# EAGLE board untitled (EAGLE 6.2)
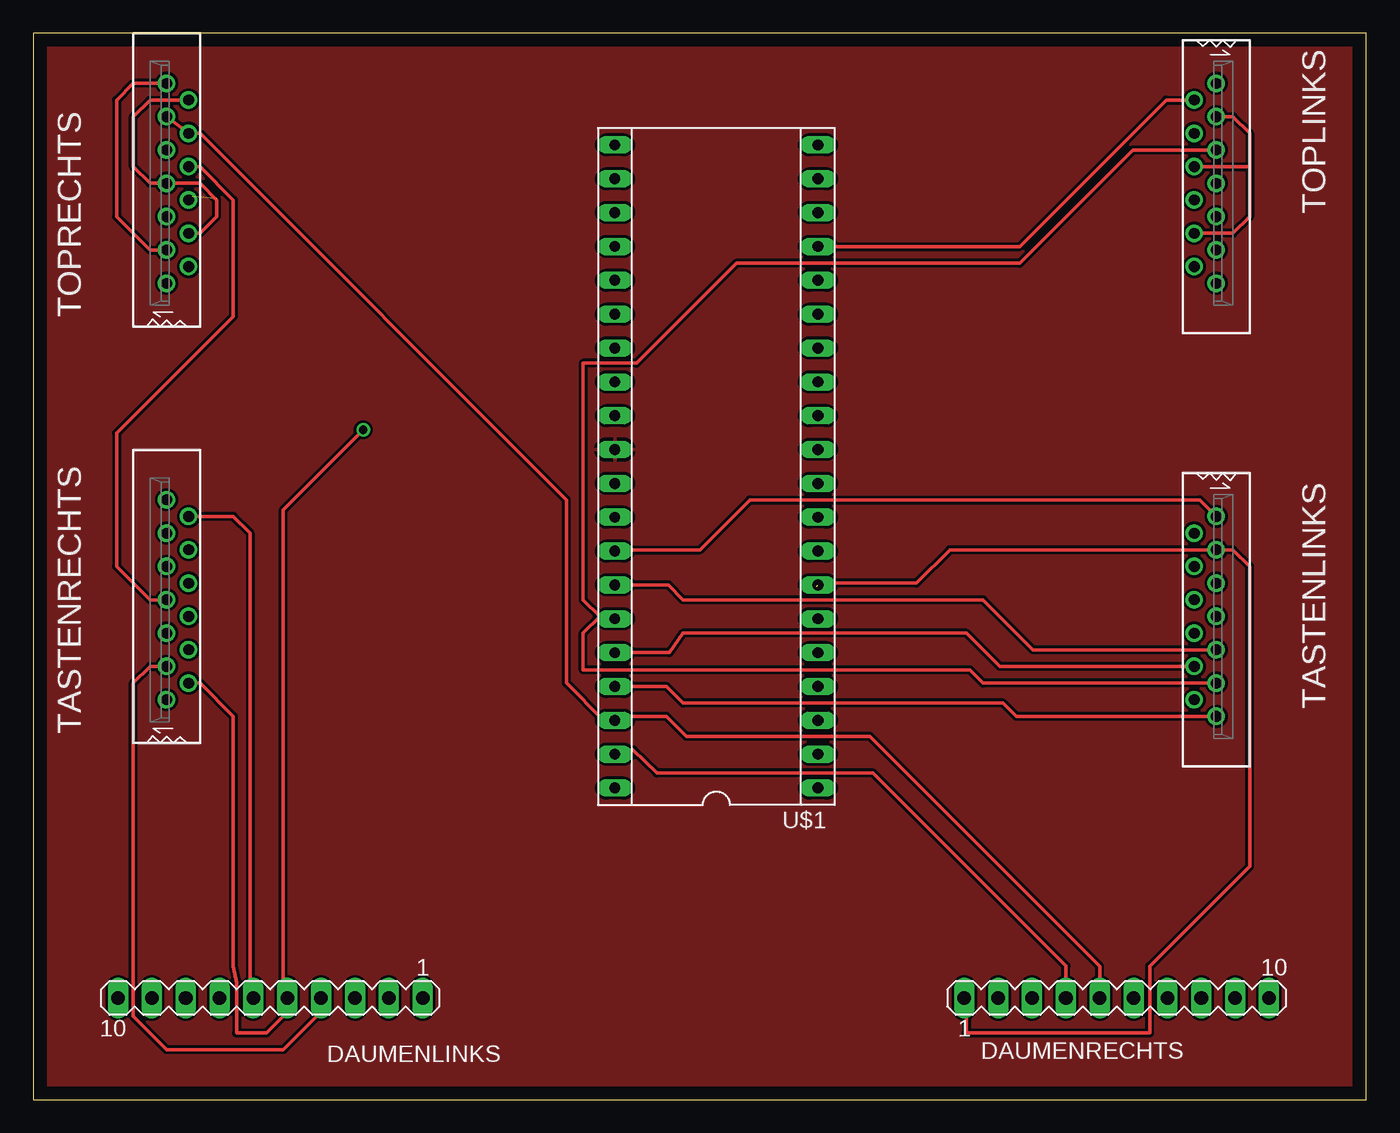
[diagram p0: board, top side]
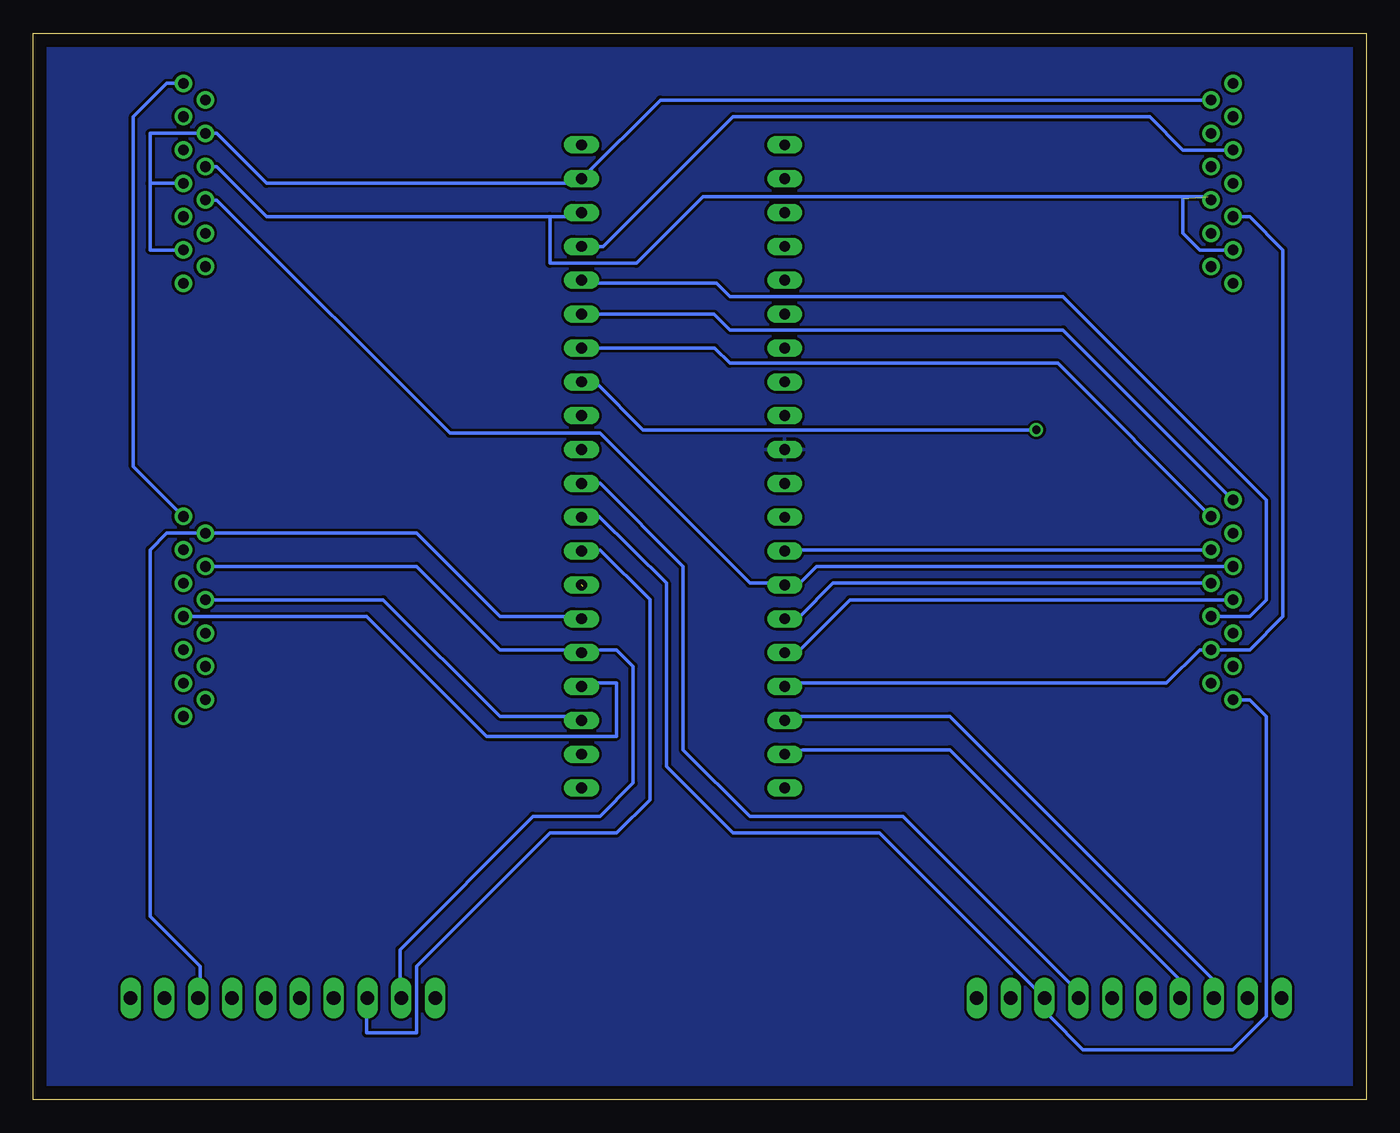
[diagram p1: board, bottom side, seen from below]

Size 100 x 80 mm. Coordinates in mm from the lower left corner, seen from the top.
Outline: 0,0 100,0 100,80 0,80 0,0
Copper layers (1*16): Top 0.035mm / dielectric 1.5mm / Bottom 0.035mm
Design rules: minimum track width 10mil, minimum drill 24mil, track to track 8mil, track to pad 8mil, pad to pad 8mil, via to via 8mil, smd to smd 8mil, copper to edge 40mil, drill to drill 8mil, minimum pad ring 10mil, minimum via ring 8mil, stop-mask expansion 4mil, vias tented up to drill 0mil, thermal gap 10mil

## Footprints (pad centres in the part's own frame; a part is rotated, then mirrored left to right if it is on the bottom)
MA10-1 = drill 1.016 long: 1 -11.43,0; 2 -8.89,0; 3 -6.35,0; 4 -3.81,0; 5 -1.27,0; 6 1.27,0; 7 3.81,0; 8 6.35,0; 9 8.89,0; 10 11.43,0
39-53-2135 = drill 0.8: P$1 -7.5,0; P$2 -6.25,-1.65; P$3 -5,0; P$4 -3.75,-1.65; P$5 -2.5,0; P$6 -1.25,-1.65; P$7 0,0; P$8 1.25,-1.65; P$9 2.5,0; P$10 3.75,-1.65; P$11 5,0; P$12 6.25,-1.65; P$13 7.5,0
TEENSY++ = drill 0.813 long: +5V -24.13,7.62; B0 -6.35,7.62; B1 -8.89,7.62; B2 -11.43,7.62; B3 -13.97,7.62; B4 -16.51,7.62; B5 -19.05,7.62; B6 -21.59,7.62; B7 -21.59,-7.62; C0 6.35,-7.62; C1 8.89,-7.62; C2 11.43,-7.62; C3 13.97,-7.62; C4 16.51,-7.62; C5 19.05,-7.62; C6 21.59,-7.62; C7 24.13,-7.62; D0 -19.05,-7.62; D1 -16.51,-7.62; D2 -13.97,-7.62; D3 -11.43,-7.62; D4 -8.89,-7.62; D5 -6.35,-7.62; D6 -3.81,-7.62; D7 -1.27,-7.62; E0 1.27,-7.62; E1 3.81,-7.62; E6 -1.27,7.62; E7 -3.81,7.62; F0 6.35,7.62; F1 8.89,7.62; F2 11.43,7.62; F3 13.97,7.62; F4 16.51,7.62; F5 19.05,7.62; F6 21.59,7.62; F7 24.13,7.62; GND -24.13,-7.62; GRND1 1.27,7.62; REF 3.81,7.62

## Placement (x,y rotation side)
DAUMENLINKS  [MA10-1]  17.78,7.62 180 top
DAUMENRECHTS  [MA10-1]  81.28,7.62 0 top
TASTENLINKS  39-53-2355  [39-53-2135]  88.75,36.25 270 top
TASTENRECHTS  39-53-2355  [39-53-2135]  10,37.5 90 top
TOPLINKS  39-53-2355  [39-53-2135]  88.75,68.75 270 top
TOPRECHTS  39-53-2355  [39-53-2135]  10,68.75 90 top
U$1  C-TEENSY++  [TEENSY++]  51.25,47.5 90 top

## Library data of the parts
DAUMENLINKS DAUMENRECHTS = con-lstb; OC_FARNELL: unknown; OC_NEWARK: unknown
TASTENLINKS TASTENRECHTS TOPLINKS TOPRECHTS = con-molex-39-53
U$1 = teensypp

## Nets
B0: TASTENLINKS.P$1 TASTENRECHTS.P$10 TOPLINKS.P$1 U$1.B0
B1: TASTENLINKS.P$9 TASTENRECHTS.P$9 TOPLINKS.P$8 U$1.B1
B2: TASTENLINKS.P$11 TASTENRECHTS.P$8 TOPLINKS.P$5 U$1.B2
B3: TASTENLINKS.P$10 TASTENRECHTS.P$7 TOPRECHTS.P$8 U$1.B3
B4: TASTENLINKS.P$13 TASTENRECHTS.P$4 TOPRECHTS.P$5 U$1.B4
B5: DAUMENLINKS.8 DAUMENRECHTS.5 TOPRECHTS.P$10 TOPRECHTS.P$11 U$1.B5
B6: DAUMENLINKS.7 DAUMENRECHTS.4 U$1.B6
C0: DAUMENLINKS.5 TASTENRECHTS.P$2 U$1.C0
C1: DAUMENLINKS.6 TASTENRECHTS.P$12 U$1.C1
C2: TASTENRECHTS.P$13 U$1.C2
C3: TASTENRECHTS.P$6 U$1.C3
C4: TOPLINKS.P$2 TOPRECHTS.P$9 U$1.C4
C5: TOPLINKS.P$3 TOPLINKS.P$6 TOPLINKS.P$10 TOPRECHTS.P$3 TOPRECHTS.P$6 TOPRECHTS.P$13 U$1.C5
C6: TOPLINKS.P$4 TOPLINKS.P$7 TOPLINKS.P$11 TOPRECHTS.P$4 TOPRECHTS.P$7 TOPRECHTS.P$12 U$1.C6
D0: TASTENLINKS.P$6 U$1.D0
D1: TASTENLINKS.P$7 U$1.D1
D2: DAUMENRECHTS.2 TASTENLINKS.P$4 U$1.D2
D3: DAUMENRECHTS.8 TASTENLINKS.P$2 U$1.D3
D4: DAUMENRECHTS.1 TASTENLINKS.P$3 U$1.D4
D5: DAUMENRECHTS.3 U$1.D5
D6: DAUMENLINKS.3 TASTENRECHTS.P$1 U$1.D6
D7: DAUMENLINKS.4 TASTENRECHTS.P$3 U$1.D7
GND: U$1.GRND1
N$1: U$1.GND
VCC: U$1.+5V

## Tracks (layer width: path | path; a pad name or v marks a point on that pad's centre or on a via)
B0
  Top 0.254: U$1.B0 45,41.25 50,41.25 53.75,45 87.5,45 TASTENLINKS.P$1
  Bottom 0.254: TOPLINKS.P$1 90,76.25 92.5,73.75 92.5,47.5 TASTENLINKS.P$1 | U$1.B0 42.5,41.25 11.75,41.25 TASTENRECHTS.P$10
B1
  Top 0.254: TASTENLINKS.P$9 75,33.75 71.25,37.5 48.75,37.5 47.64,38.61 U$1.B1
  Bottom 0.254: TASTENRECHTS.P$9 41.25,40 42.5,38.75 U$1.B1 43.77,38.75 46.25,38.75 57.5,50 68.75,50 86.25,67.5 TOPLINKS.P$8
B2
  Top 0.254: TASTENLINKS.P$11 71.25,31.25 70.25,32.25 41.25,32.25 41.25,35 42.5,36.25 | 42.5,36.25 43.45,36.25 U$1.B2 | TOPLINKS.P$5 82.5,71.25 74,62.75 52.75,62.75 45.25,55.25 41.25,55.25 41.25,37.5 42.5,36.25
  Bottom 0.254: TASTENRECHTS.P$8 40,38.75 42.5,36.25 U$1.B2
B3
  Top 0.254: TASTENLINKS.P$10 72.5,32.5 70,35 48.75,35 47.72,33.53 U$1.B3 | TOPRECHTS.P$8 12.5,70 15,67.5 15,58.75 6.25,50 6.25,40 8.75,37.5 TASTENRECHTS.P$7
  Bottom 0.254: TASTENRECHTS.P$7 38.75,37.5 42.5,33.75 U$1.B3
B4
  Top 0.254: TASTENLINKS.P$13 73.75,28.75 72.75,29.75 48.75,29.75 47.51,30.99 U$1.B4
  Bottom 0.254: TOPRECHTS.P$5 8.75,66.25 6.25,63.75 6.25,36.25 8.75,33.75 TASTENRECHTS.P$4 12.5,33.75 15,31.25 42.5,31.25 U$1.B4
B5
  Top 0.254: DAUMENRECHTS.5 80.01,9.99 62.75,27.25 49,27.25 47.5,28.75 43.93,28.75 U$1.B5 43.5,28.5 42.75,28.5 40,31.25 40,45 12.5,72.5 TOPRECHTS.P$10 TOPRECHTS.P$11
  Bottom 0.254: DAUMENLINKS.8 11.25,8.75 31.25,28.75 42.5,28.75 42.75,28.5 43.5,28.5 U$1.B5
B6
  Top 0.254: DAUMENRECHTS.4 77.47,10.03 63,24.5 46.79,24.5 45,26.25 U$1.B6
  Bottom 0.254: DAUMENLINKS.7 13.75,8.75 31.25,26.25 42.25,26.25 U$1.B6
C0  (via drill 0.61)
  Top 0.254: v24.75,50.25 18.75,44.25 18.75,8.25 DAUMENLINKS.5 18.75,6.25 17.5,5 15.25,5 15.25,8.75 15,10 15,28.75 12.5,31.25 TASTENRECHTS.P$2
  Bottom 0.254: v24.75,50.25 54.25,50.25 57.75,53.75 U$1.C0
C1
  Top 0.254: DAUMENLINKS.6 16.5,8.25 16.5,8.5 16.25,8.75 16.25,42.5 15,43.75 TASTENRECHTS.P$12
  Bottom 0.254: TASTENRECHTS.P$12 23.15,55.25 47.75,55.25 48.89,56.39 U$1.C1
C2
  Bottom 0.254: U$1.C2 48.93,58.93 47.75,57.75 22.75,57.75 TASTENRECHTS.P$13
C3
  Bottom 0.254: U$1.C3 58.65,61.25 48.75,61.25 47.75,60.25 22.75,60.25 7.5,45 7.5,37.5 8.75,36.25 TASTENRECHTS.P$6
C4
  Top 0.254: U$1.C4 74.01,64.01 85,75 TOPLINKS.P$2
  Bottom 0.254: U$1.C4 57.24,64.01 47.5,73.75 16.25,73.75 13.75,71.25 TOPRECHTS.P$9
C5  (1 unrouted)
  Top 0.254: TOPLINKS.P$3 90,73.75 91.25,72.5 91.25,70 | 91.25,70 91.25,66.25 90,65 TOPLINKS.P$10 | TOPRECHTS.P$13 7.5,76.25 6.25,75 6.25,66.25 8.75,63.75 TOPRECHTS.P$3 | TOPLINKS.P$6 91.25,70
  Bottom 0.254: 61.25,66.25 82.5,66.25 86.25,70 TOPLINKS.P$6 | TOPRECHTS.P$6 11.9,67.75 49.75,67.75 54.75,62.75 61.25,62.75 61.25,66.25 | TOPRECHTS.P$3 12.5,63.75 13.75,65 13.75,67.6 | 61.25,66.25 60,66.25 59.7,66.55 U$1.C5
C6
  Top 0.254: TOPRECHTS.P$4 12.5,65 13.75,66.25 13.75,67.5 12.5,68.75 TOPRECHTS.P$7 8.75,68.75 7.5,70 7.5,73.75 8.75,75 TOPRECHTS.P$12
  Bottom 0.254: 91.25,68.75 91.25,72.5 TOPLINKS.P$4 86.25,72.5 82.5,68.75 60,68.75 59.66,69.09 U$1.C6 52.96,75 TOPRECHTS.P$12 | TOPLINKS.P$7 91.25,68.75 | 91.25,68.75 91.25,63.75 TOPLINKS.P$11
D0
  Bottom 0.254: TASTENLINKS.P$6 73.75,37.5 65,28.75 60,28.75 59.7,28.45 U$1.D0
D1
  Bottom 0.254: TASTENLINKS.P$7 75,36.25 66,27.25 56.25,27.25 56.25,31.25 57.88,31.25 U$1.D1
D2
  Bottom 0.254: TASTENLINKS.P$4 71.25,40 65,33.75 60,33.75 59.03,33.53 U$1.D2 57.5,33.75 56.25,33.75 55,32.5 55,23.75 57.5,21.25 62.51,21.25 72.5,11.25 72.5,7.73 DAUMENRECHTS.2
D3
  Bottom 0.254: U$1.D3 59.82,36.07 60,36.25 65,36.25 71.25,42.5 TASTENLINKS.P$2 90,42.5 91.25,41.25 91.25,13.74 87.5,10 87.5,8.75 DAUMENRECHTS.8
D4  (1 unrouted)
  Top 0.254: 58.75,38.5 59.25,38.75 66.25,38.75 68.75,41.25 TASTENLINKS.P$3 90,41.25 91.25,40 91.25,17.5 83.75,10 83.75,5 70,5 70,7.47 DAUMENRECHTS.1
D5
  Bottom 0.254: DAUMENRECHTS.3 75,7.55 75,5 71.25,5 71.25,10 61.25,20 56.25,20 53.75,22.5 53.75,37.53 57.5,41.25 U$1.D5
D6
  Bottom 0.254: TASTENRECHTS.P$1 8.75,30 7.5,28.75 7.5,6.25 10,3.75 21.25,3.75 23.75,6.25 23.75,7.5 DAUMENLINKS.3 36.51,20 47.5,20 52.5,25 52.5,38.75 57.56,43.75 U$1.D6
D7
  Top 0.254: TASTENRECHTS.P$3 8.75,32.5 7.5,31.25 7.5,6.25 10,3.75 18.75,3.75 21.25,6.25 21.25,7.5 DAUMENLINKS.4
  Bottom 0.254: U$1.D7 57.5,46.25 51.25,40 51.25,26.25 46.25,21.25 34.75,21.25 21.75,8.25 DAUMENLINKS.4
GND
  pour Top: 0,0 100,0 100,80 0,80
  pour Bottom: 0,80 100,80 100,0 0,0